# Altium PCB Extension.PcbDoc
Units mil, origin at the board's own origin, x right, y up, seen from the top; angles counter-clockwise.
Board outline 1900 x 2770 mil, 2 copper layers (Top Layer, Bottom Layer); 26 components, 28 nets, 86 pads, 4 vias.
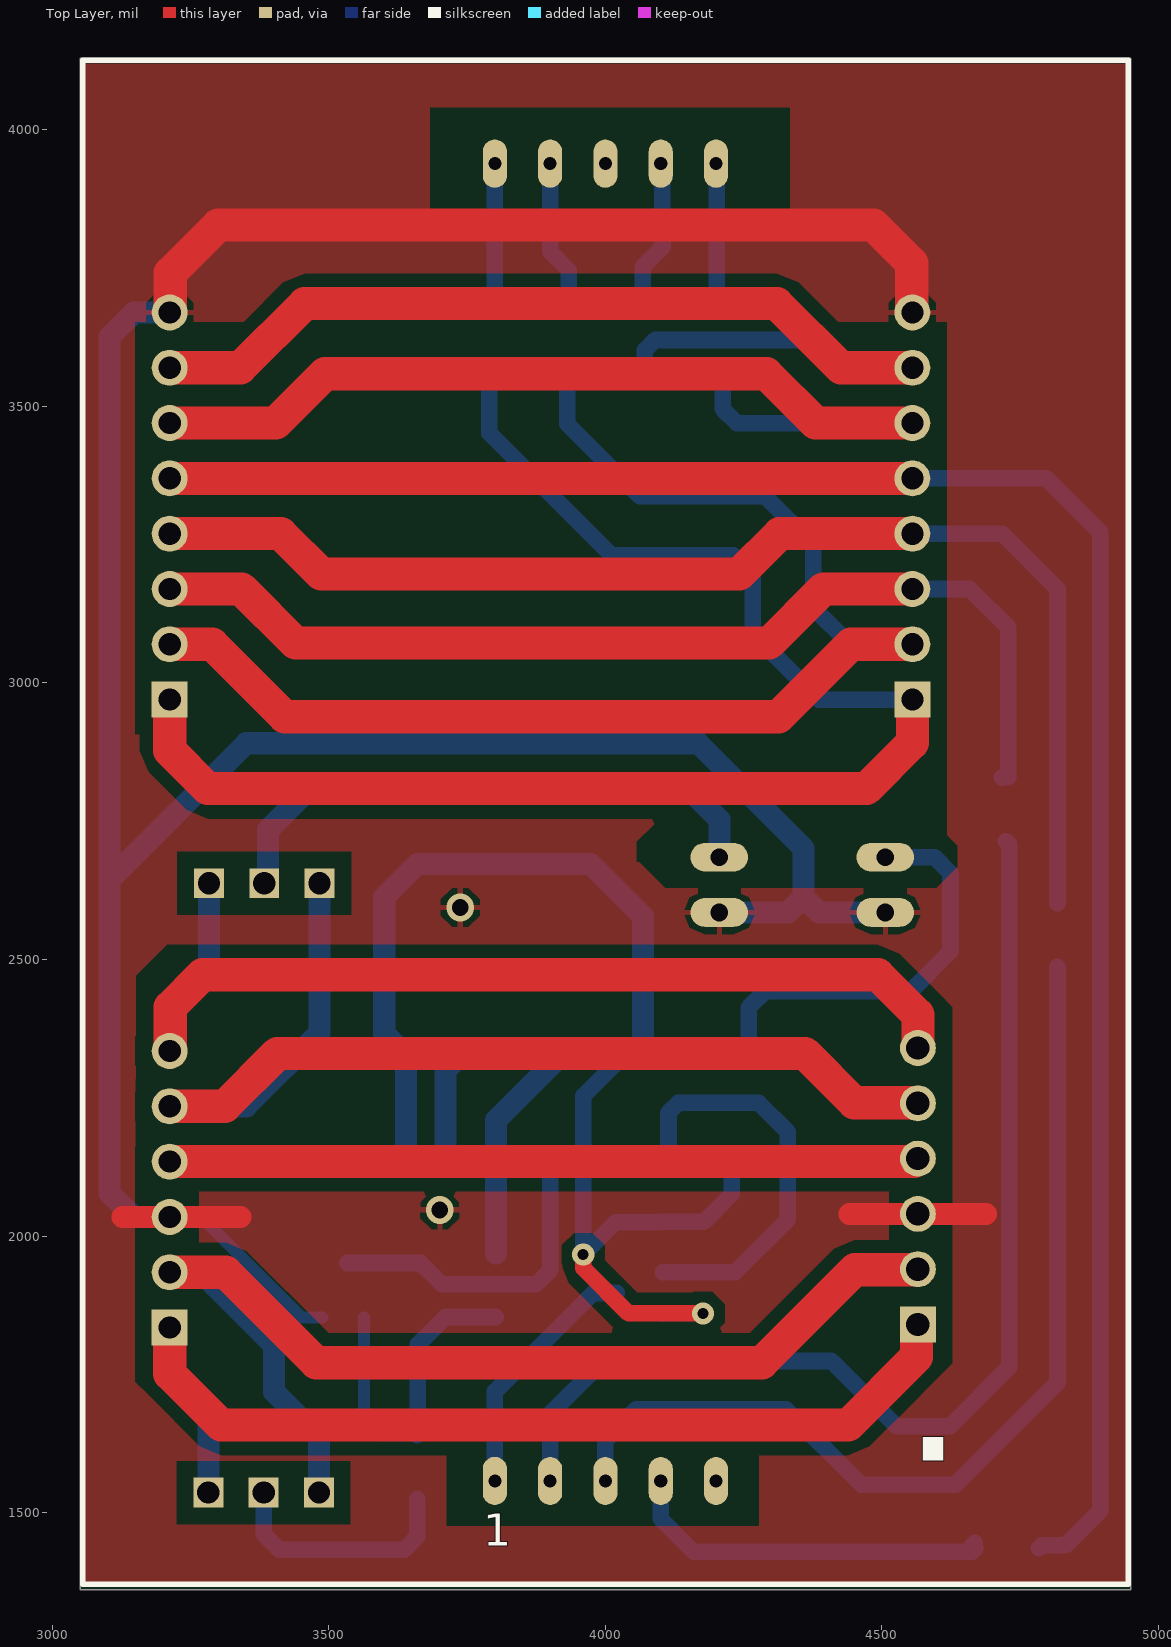
[diagram p0: Top Layer view]
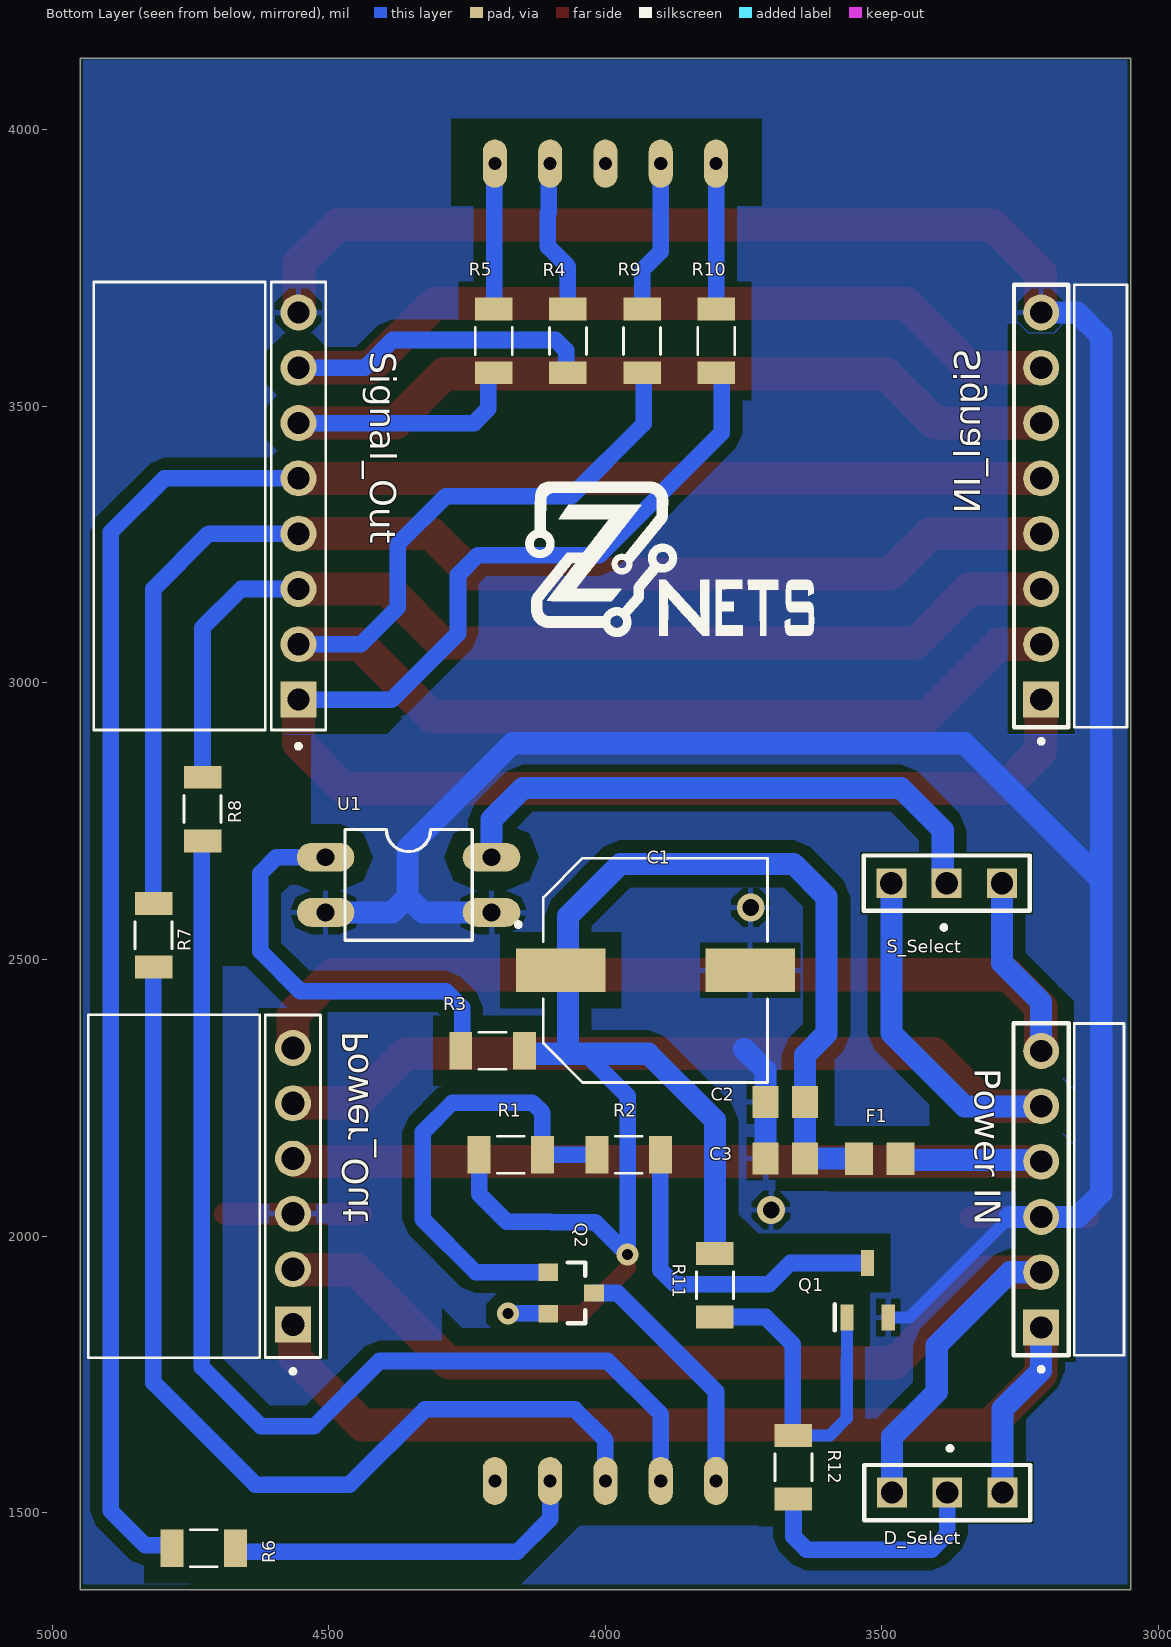
[diagram p1: Bottom Layer view, seen from below]
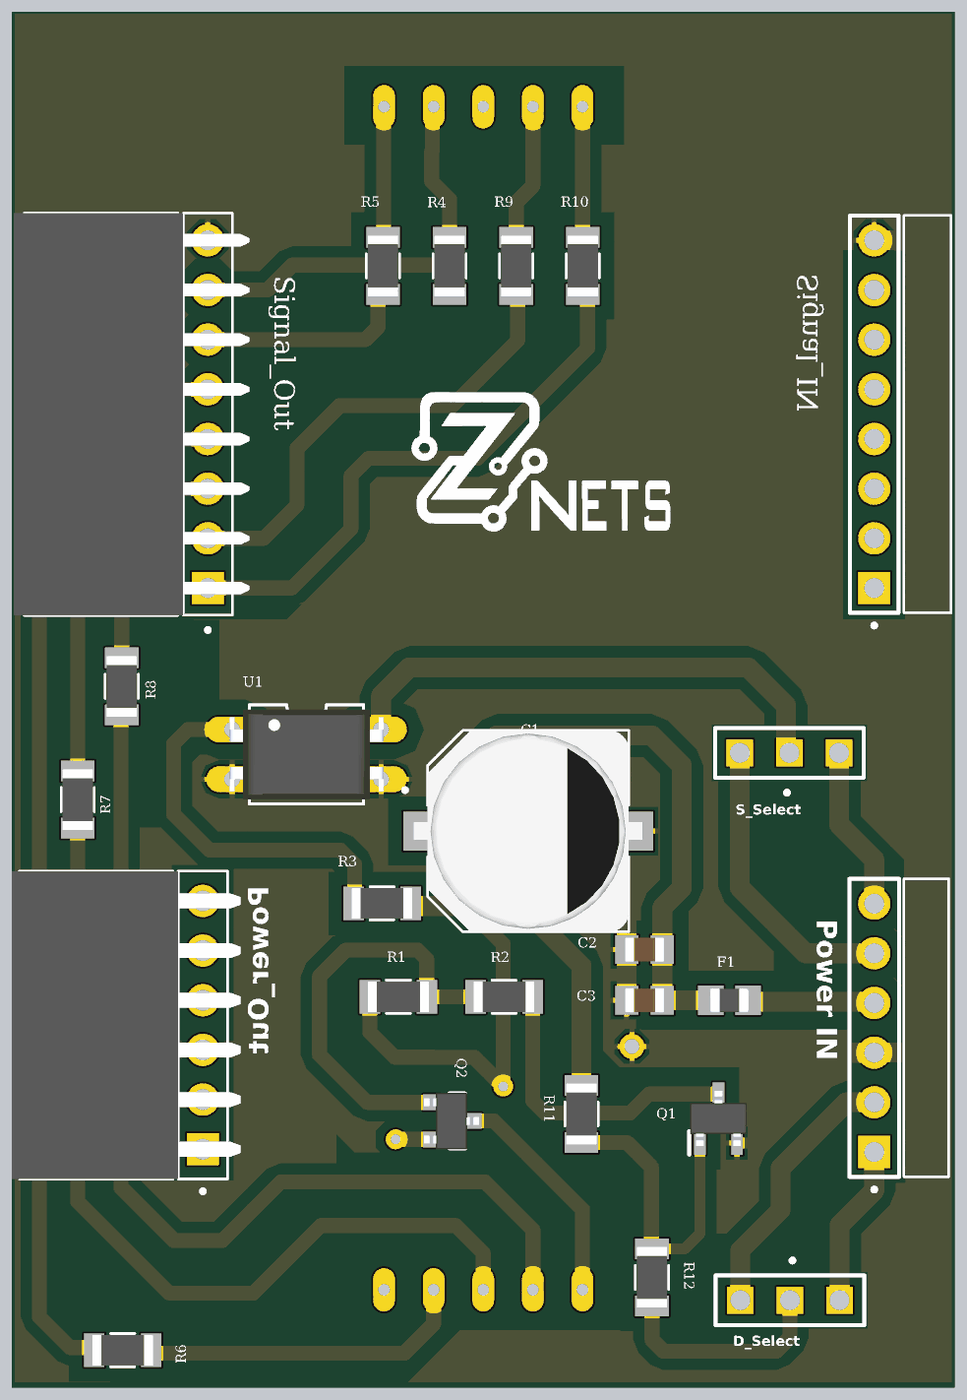
[diagram p2: 3D render of the assembled board from below, using the file's embedded part models]

## Layer stack, top to bottom
Top Solder: solder mask 0.4, Solder Resist, Dk 3.5
Top Layer: signal copper 1.4
Dielectric 1: dielectric 12.6, FR-4, Dk 4.8
Bottom Layer: signal copper 1.4
Bottom Solder: solder mask 0.4, Solder Resist, Dk 3.5

## Board outline
3050,1360 3050,4130 4950,4130 4950,1360

## Design rules (kind name [scope] priority, off if disabled: settings)
Clearance [All] p1: gap=20 ignorepadtopadclearanceinfootprint=FALSE except(0: Arc-Hole Track-Hole SMDPad-Hole THPad-Hole Via-Hole Fill-Hole Poly-Hole Region-Hole Text-Hole; 10: Fill-Fill Fill-Poly Fill-Region Poly-Poly Poly-Region Region-Region; 30: SMDPad-Fill SMDPad-Poly SMDPad-Region THPad-Fill THPad-Poly THPad-Region)
PolygonConnect [All] p1: connectstyle=Relief reliefconductorwidth=10 reliefentries=4 polygonreliefangle="90 Angle" airgapwidth=10
RoomDefinition Extension [InComponentClass('Extension')] p1: confinementstyle=ConfineIn formatcopy=TRUE lockcomponents=FALSE outline 3050,1360 4950,1360 4950,4130 3050,4130
RoutingVias [All] p1: holewidth=28 width=50 viastyle="Through Hole" minholewidth=28 minwidth=50 maxholewidth=28 maxwidth=50
SolderMaskExpansion [All] p1: expansion=4 istentingtop=FALSE
UnpouredPolygon [InNet('GND_M')] p1:
Width [All] p1: maxlimit=100 minlimit=20 preferedwidth=30 bottomlayer_maxwidth=50 minimp=50.000000 maximp=50.000000 favimp=50.000000
29 further rules are at their usual default settings.

## Components (designator, comment, footprint, x,y, rotation, side; value= is the part's Value field where it differs from the comment)
. "7 Seg" 2.3_7-SEG_DIS 4000,2750 r0 top (schematic designator .1)
C1 "100uF 35V" "100uF 35V" 3909.5,2480.5 r180 bottom
C2 "1uF" "Capacitor 0805" 3675,2242 r0 bottom
C3 "100nF" "Capacitor 0805" 3675,2140 r0 bottom
D_Select "Pin Header Male 3 Pin" 3Pin-M-Header_3MX1-254MM 3482,1536 r270 bottom (schematic designator D_Select1)
F1 "Ferrite Bead 0805" "Ferrite Bead 0805" 3504,2140 r0 bottom
"Power IN" "Pin Header Male 6 Pin" 6Pin-M-Header_6MX1-254MM 3212.13,2084.5 r270 bottom (schematic designator "Power IN1")
Power_Out "Pin Header Female 6 Pin" 6Pin-F-Header_6FX1-254MM 4565,2090 r90 bottom (schematic designator Power_Out1)
Q1 "AO3400-N" AO-3400-N-SOT95 3526,1902 r90 bottom
Q2 "AO3401-P" AO-3401-P-SOT23-3 4064,1897 r270 bottom
R1 "100K" "Resistor 1206" 4171,2147 r180 bottom
R2 "100R" "Resistor 1206" 3958,2147 r180 bottom
R3 "1K" "Resistor 1206" 4204,2335 r180 bottom
R4 "240R" "Resistor 1206" 4067.83,3618.5 r90 bottom
R5 "240R" "Resistor 1206" 4202,3618.5 r90 bottom
R6 "240R" "Resistor 1206" 4726.5,1435.5 r180 bottom
R7 "240R" "Resistor 1206" 4817,2544.02 r270 bottom
R8 "240R" "Resistor 1206" 4728.5,2772 r270 bottom
R9 "240R" "Resistor 1206" 3933.67,3618.5 r90 bottom
R10 "240R" "Resistor 1206" 3799.5,3618.5 r90 bottom
R11 "100K" "Resistor 1206" 3802,1911 r270 bottom
R12 "4.7K" "Resistor 1206" 3660,1582 r270 bottom
S_Select "Pin Header Male 3 Pin" 3Pin-M-Header_3MX1-254MM 3283,2638 r90 bottom (schematic designator S_Select1)
Signal_IN "Pin Header Male 8 Pin" 8Pin-M-Header_8MX1-254MM 3212.13,3320 r270 bottom (schematic designator Signal_IN1)
Signal_Out "Pin Header Female 8 Pin" 8Pin-F-Header_8FX1-254MM 4555,3320 r90 bottom (schematic designator Signal_Out1)
U1 "PC817X3NSZ9F" "PC 817" 4356,2635 r270 bottom

## Footprints (in the part's own frame and the unit in brackets; to place one, negate y for a bottom-side part, rotate by r counter-clockwise, add the part's x,y. Pads: shape width x height; smd on the part's side, far side on the other; paste and mask are expansions set on the pad)
2.3_7-SEG_DIS [mm]
  oval 1.108x2.216 hole 0.6: 1(-5.08,-30.3) 2(-2.54,-30.302) 3(0,-30.302) 4(2.54,-30.302) 5(5.08,-30.302) 6(5.08,30.201) 7(2.54,30.201) 8(0,30.201) 9(-2.54,30.201) 10(-5.08,30.201)
  silkscreen extent -24,-35.05 24,34.95
3Pin-M-Header_3MX1-254MM [mm]
  rect 1.37x1.37 hole 1.02: 01(0,0) 02(0,2.54) 03(0,5.08)
  silkscreen extent -2.13,-1.27 1.27,6.35
6Pin-F-Header_6FX1-254MM [mil]
  rect 65x65 hole 42.13: 1(-250,0)
  round 65 hole 42.13: 2(-150,0) 3(-50,0) 4(50,0) 5(150,0) 6(250,0)
  silkscreen extent -339,-50 310,370, body extent -310,-76 310,385, height 101
6Pin-M-Header_6MX1-254MM [mil]
  rect 65x65 hole 40.16: 01(250,0)
  round 65 hole 40.16: 02(150,0) 03(50,0) 04(-50,0) 05(-150,0) 06(-250,0)
  silkscreen extent -300,-50 330,150
8Pin-F-Header_8FX1-254MM [mil]
  rect 65x65 hole 40.16: 1(-350,0)
  round 65 hole 40.16: 2(-250,0) 3(-150,0) 4(-50,0) 5(50,0) 6(150,0) 7(250,0) 8(350,0)
  silkscreen extent -438,-49 405,370, body extent -405,-84 405,391, height 99
8Pin-M-Header_8MX1-254MM [mil]
  rect 65x65 hole 40.16: 01(350,0)
  round 65 hole 40.16: 02(250,0) 03(150,0) 04(50,0) 05(-50,0) 06(-150,0) 07(-250,0) 08(-350,0)
  silkscreen extent -400,-49 430,155
"100uF 35V" [mm]
  rect 4.1x2 smd: 1(-4.35,0) 2(4.35,0)
  silkscreen extent -6.4,-5.15 5.15,5.15, body extent -5.85,-5.15 5.85,5.15, height 10.32
AO-3400-N-SOT95 [mm]
  rect 1.2x0.6 smd: 1(-1.25,0.95) 2(-1.25,-0.95) 3(1.25,0)
  silkscreen extent -1.85,1.5 -0.65,1.5, body extent -1.4,-1.45 1.4,1.45, height 1.25
AO-3401-P-SOT23-3 [mm]
  rect 0.8x0.9 smd: 1(-0.95,-1) 2(0.95,-1) 3(0,1.1)
  silkscreen extent -1.4,-0.1 1.4,0.7, body extent -1.45,-1.4 1.45,1.4, height 1.25
"Capacitor 0805" [mm]
  rect 1.19x1.47 smd: 1(-0.91,0) 2(0.91,0)
  body extent -1,-0.63 1,0.63, height 1.45
"Ferrite Bead 0805" [mm]
  rect 1.3x1.5 smd: 1(-0.95,0) 2(0.95,0)
  body extent -1,-0.63 1,0.63, height 1.05
"PC 817" [mil]
  oval 52x104 hole 32: 1(-50,-150) 2(50,-150) 3(50,150) 4(-50,150)
  silkscreen extent -100,-115 100,115, body extent -91,-155 91,155, height 329
"Resistor 1206" [mm]
  rect 1.05x1.72 smd: 1(-1.46,0) 2(1.46,0)
  silkscreen extent -0.62,-0.85 0.62,0.85, body extent -1.55,-0.77 1.55,0.77, height 0.65

## Part data
C1: "100ÂµF 35V Aluminum Electrolytic Capacitors Radial, Can - SMD 2000 Hrs @ 85Â°C", Package="RADIAL-2 Panasonic", Availability="In Stock", Check_prices=https://www.snapeda.com/parts/EEH-ZC1J330P/Panasonic/view-part/509435/?ref=eda, MF=Panasonic, MP=EEH-ZC1J330P, Price=None, Purchase-URL=https://pricing.snapeda.com/search/part/EEH-ZC1J330P/?ref=eda, SnapEDA_Link=https://www.snapeda.com/parts/EEH-ZC1J330P/Panasonic/view-part/509435/?ref=snap
C2 C3: library part "Capacitor 0805", "0.1 ÂµF Â±10% 50V Ceramic Capacitor X7R 0805 (2012 Metric)", Package="2012 Murata", Check_prices=https://www.snapeda.com/parts/GCE21BR71H104KA01L/Murata+Electronics+North+America/view-part/?ref=eda, MF=Murata, MP=GCE21BR71H104KA01L, SnapEDA_Link=https://www.snapeda.com/parts/GCE21BR71H104KA01L/Murata+Electronics+North+America/view-part/?ref=snap
D_Select "Power IN" S_Select Signal_IN: Package=None, Availability=Unavailable, Price=None
  D_Select S_Select: MP=TSW-101-23-L-T
  "Power IN": MP=MTSW-106-24-G-S-300
  Signal_IN: MP=HTSW-108-07-G-S-LL
F1: "BLM Series 0805 1 kOhm 200 mA 0.45 DCR Surface Mount Ferrite Bead", Package="805-2 Murata", Check_prices=https://www.snapeda.com/parts/BLM21AH102SN1D/Murata/view-part/?ref=eda, MF=Murata, MP=BLM21AH102SN1D, SnapEDA_Link=https://www.snapeda.com/parts/BLM21AH102SN1D/Murata/view-part/?ref=snap
Power_Out: "6 Position Total Single Row 2.54 mm Pitch Straight Female Header", Package=None, Check_prices=https://www.snapeda.com/parts/PPTC061LFBNRC/Sullins/view-part/?ref=eda, MF="Sullins Connector Solutions", MP=PPTC061LFBNRC, SnapEDA_Link=https://www.snapeda.com/parts/PPTC061LFBNRC/Sullins/view-part/?ref=snap
Q1: "N-Channel 30 V 5.8A (Ta) 1.4W (Ta) Surface Mount SOT-23-3", Package="SOT-23-3 Alpha &amp; Omega Semiconductor", Check_prices=https://www.snapeda.com/parts/AO3400/Alpha+%2526+Omega+Semiconductor+Inc./view-part/?ref=eda, MF="Alpha &", MP=AO3400, SnapEDA_Link=https://www.snapeda.com/parts/AO3400/Alpha+%2526+Omega+Semiconductor+Inc./view-part/?ref=snap
Q2: "P-Channel 30 V 4A (Ta) 1.4W (Ta) Surface Mount SOT-23-3", Package="SOT-23-3 Alpha &amp; Omega Semiconductor", Check_prices=https://www.snapeda.com/parts/AO3401/Alpha/view-part/?ref=eda, MF="Alpha & Omega Semiconductor", MP=AO3401, SnapEDA_Link=https://www.snapeda.com/parts/AO3401/Alpha/view-part/?ref=snap
R1 R2 R3 R4 R5 R6 R7 R8 R9 R10 R11 R12: library part "Resistor 1206", "Fixed Resistor CRGCQ 1206 10K 5%", Package="3115 TE Connectivity", Check_prices=https://www.snapeda.com/parts/CRGCQ1206J10K/TE+Connectivity/view-part/?ref=eda, MF="TE Connectivity", MP=CRGCQ1206J10K, SnapEDA_Link=https://www.snapeda.com/parts/CRGCQ1206J10K/TE+Connectivity/view-part/?ref=snap
Signal_Out: "Headers & Wire Housings 2.54MM 0.1 8-PIN FEMALE HEADER", Package=None, Availability="In Stock", Check_prices=https://www.snapeda.com/parts/8Fx1-254mm/Gravitech/view-part/?ref=eda, MF=Gravitech, MP=8Fx1-254mm, Price=None, Purchase-URL=https://pricing.snapeda.com/search/part/8Fx1-254mm/?ref=eda, SnapEDA_Link=https://www.snapeda.com/parts/8Fx1-254mm/Gravitech/view-part/?ref=snap
U1: "Optoisolator Transistor Output 5000Vrms 1 Channel 4-DIP", Package="DIP-4 Sharp Microelectronics", Check_prices=https://www.snapeda.com/parts/PC817X3NSZ9F/Sharp+Microelectronics/view-part/?ref=eda, MF="Sharp Microelectronics", MP=PC817X3NSZ9F, SnapEDA_Link=https://www.snapeda.com/parts/PC817X3NSZ9F/Sharp+Microelectronics/view-part/?ref=snap

## Via types
v1: diameter 40, hole 20, Top Layer to Bottom Layer, 2 vias
v2: diameter 50, hole 30, Top Layer to Bottom Layer, 2 vias

## Nets (pads, with @x,y where several pads share a name; then routed paths per layer and width w, separated by ;. In a path a pad name is that pad's centre, name@x,y a point inside that pad or via, vN(x,y) a via of type N, cw(c..) or ccw(c..) an arc to the next point about the centre after c; other vN are vias at no path point)
12V_M: C1.1 C2.1 C3.1 F1.2 Q2.2 R1.1 R3.2 R11.1 | length 3135.8
  Top Layer w30: v1(3959.81,1966.31) 3959.81,1942.19 4042,1860 v1(4176.5,1860)
  Bottom Layer w30: 4036,2329.62 3959.81,2253.43 v1(3959.81,1966.31) 4018.71,2025.21 4098.25,2025.21 4098.55,2025.5 4178.09,2025.5 4228.48,2075.89 R1.1 ; Q2.2 4103.77,1860 v1(4176.5,1860)
  Bottom Layer w40: F1.2 C3.1 3639.17,2326.83 3600,2366 3600,2613 3660,2673 3973,2673 4067.76,2578.24 4067.76,2329.62 ; R11.1 3802,2209.24 3922.38,2329.62 4036,2329.62 4067.76,2329.62 ; R3.2 4146.52,2330.29 4145.85,2329.62 4067.76,2329.62
12V_S: "Power IN.04" F1.1 Power_Out.4 | length 1611.9
  Top Layer w60: 3212.13,2134.5 4558.15,2134.5 4563.65,2140 Power_Out.4
  Bottom Layer w30: 3212.13,2134.5 3214.88,2137.25 ; F1.1@3463.85,2137.25 F1.1
  Bottom Layer w40: 3214.88,2137.25 F1.1@3463.85,2137.25
A_M: R4.1 Signal_IN.07 Signal_Out.7 | length 1988.6
  Top Layer w60: Signal_IN.07 3340,3570 3456,3686 4310,3686 4426,3570 Signal_Out.7
  Bottom Layer w30: R4.1@4071.33,3564.52 4071,3564.85 4071,3601.43 4089.76,3620.19 4384.81,3620.19 4435,3570 Signal_Out.7
B_M: R5.1 Signal_IN.06 Signal_Out.6 | length 1839.2
  Top Layer w60: Signal_IN.06 3404,3470 3493,3559 4291,3559 4380,3470 Signal_Out.6
  Bottom Layer w30: R5.1@4212,3564.52 4212,3495.5 4237.5,3470 Signal_Out.6
C_M: R6.1 Signal_IN.05 Signal_Out.5 | length 3629.7
  Top Layer w60: Signal_IN.05 Signal_Out.5@4553.65,3370
  Bottom Layer w30: Signal_Out.5 4797.5,3370 4894.5,3273 4894.5,1503 4832.08,1440.58 4789.06,1440.58 R6.1
D_M: R7.1 Signal_IN.04 Signal_Out.4 | length 2276
  Top Layer w60: Signal_IN.04 3413,3270 3486,3197 4242,3197 4315,3270 Signal_Out.4
  Bottom Layer w30: Signal_Out.4 4717.5,3270 4817.5,3170 4817.5,2602 R7.1
DIG3_M: "Power IN.02" D_Select.01 Power_Out.2 | length 2033.9
  Top Layer w60: 3212.13,1934.5 3313.5,1934.5 3477,1771 4283,1771 4451.04,1939.04 4564.04,1939.04 Power_Out.2
  Bottom Layer w40: 3212.13,1934.5 3268.5,1934.5 3401,1802 3401,1718 3482,1637 D_Select.01
DIG4_M: "Power IN.01" D_Select.03 Power_Out.1 | length 1910.6
  Top Layer w60: 3212.13,1834.5 3212.13,1750.87 3305,1658 4439,1658 4562.5,1781.5 4562.5,1837.5 Power_Out.1
  Bottom Layer w40: 3212.13,1834.5 3212.13,1756.87 3282,1687 D_Select.03
DIG_NPN: D_Select.02 R12.2 | length 442.4
  Bottom Layer w30: D_Select.02 3382,1461 3410,1433 3636.57,1433 3660,1456.43 R12.2
E_M: R8.1 Signal_IN.03 Signal_Out.3 | length 1897.8
  Top Layer w60: Signal_IN.03 3342,3170 3440,3072 4296,3072 4394,3170 Signal_Out.3
  Bottom Layer w30: Signal_Out.3 4658.5,3170 4728.5,3100 R8.1 ; R8.1@4717,2828.98 R8.1@4717.5,2829.48
F_M: R9.1 Signal_IN.02 Signal_Out.2 | length 2403.5
  Top Layer w60: Signal_IN.02 3289,3070 3420,2939 4313,2939 4444,3070 Signal_Out.2
  Bottom Layer w30: R9.1@3930.67,3564.52 3930.67,3468.83 4062,3337.5 4289,3337.5 4375.5,3251 4375.5,3136.75 4442.25,3070 Signal_Out.2
G_M: R10.1 Signal_IN.01 Signal_Out.1 | length 2715.2
  Top Layer w60: Signal_IN.01 3212.13,2877.87 3281,2809 4472,2809 4555,2892 Signal_Out.1
  Bottom Layer w30: R10.1@3790,3564.52 3790,3452 4011,3231 4231,3231 4266.5,3195.5 4266.5,3089.5 4386,2970 Signal_Out.1
GND_M: "Power IN.03" C1.2 C2.2 C3.2 Power_Out.3 Q1.2 Signal_IN.08 Signal_Out.8 U1.2 U1.3 | length 6250.2
  Top Layer w30: 3125,2032.5 3127,2034.5 ; 3340,2034.5 3342.5,2037 ; 4440.5,2039 4441.5,2040 ; 4688,2040 4689.5,2041.5
  Top Layer w40: 3127,2034.5 3212.13,2034.5 3340,2034.5 ; 4441.5,2040 Power_Out.3 4688,2040
  Top Layer w60: Signal_IN.08 3213.08,3670.96 3213.08,3741.08 3300,3828 4485,3828 4554.04,3758.96 4554.04,3670.96 Signal_Out.8
  Bottom Layer w22: 3269,2034.5 3450.71,1852.79 Q1.2
  Bottom Layer w40: Signal_IN.08 3147.5,3670 3103.5,3626 3103.5,2644 ; 3269,2034.5 3212.13,2034.5 3212.03,2034.59 3146.41,2034.59 3103.5,2077.5 3103.5,2644 ; C3.2 C2.2 3710.83,2299.83 3749.24,2338.24 ; U1.3 4330,2585 4358,2613 ; U1.2 4386,2585 4358,2613 ; 3103.5,2644 3350.5,2891 4168,2891 4358,2701 4358,2613
  other v2: 3700.5,2047 3737.5,2594
M_IN: S_Select.02 U1.4 | length 1038
  Bottom Layer w40: S_Select.02 3389.97,2644.97 3389.97,2733.97 3466,2810 4149,2810 4206,2753 U1.4
M_IN_1: "Power IN.06" Power_Out.6 S_Select.01 | length 1878.5
  Top Layer w60: 3213,2334.5 3213,2414 3271.37,2472.37 4492.63,2472.37 4565,2400 Power_Out.6
  Bottom Layer w40: 3212.13,2334.5 3212.13,2423.13 3283,2494 S_Select.01
M_IN_2: "Power IN.05" Power_Out.5 S_Select.03 | length 2026.5
  Top Layer w60: 3212.13,2234.5 3311.5,2234.5 3407,2330 4361,2330 4450.04,2240.96 4564.04,2240.96 Power_Out.5
  Bottom Layer w40: 3212.13,2234.5 3350.5,2234.5 3483,2367 S_Select.03
Net._1: ..1 Q2.3 | length 456.3
  Bottom Layer w30: ..1 3800,1719 3978,1897 Q2.3
Net._2: ..2 R8.2 | length 2037.8
  Bottom Layer w30: ..2 3900,1678 3996,1774 4408.5,1774 4526.49,1656.01 4623.03,1656.01 4730,1762.99 4730,2708.35 4724.33,2714.02 R8.2@4723.83,2714.02
Net._3: ..3 R7.2 | length 1800
  Bottom Layer w30: ..3 4000,1631 4055.5,1686.5 4326.5,1686.5 4462.5,1550.5 4633,1550.5 4817.5,1735 4817.5,2486.04 R7.2
  Bottom Layer w40: ..3 ..3@4000.69,1557.69
Net._4: ..4 R6.2 | length 671.2
  Bottom Layer w30: ..4 4100,1488.5 4159.5,1429 4663.35,1429 4669.02,1434.67 R6.2 ; R6.2@4663.36,1441.16 R6.2@4667.52,1445.31
Net._6: ..6 R5.2 | length 263.8
  Bottom Layer w30: ..6 4201,3938 4201,3676.98 R5.2
Net._7: ..7 R4.2 | length 279.7
  Bottom Layer w30: R4.2 4067.83,3752.83 4104,3789 4104,3849.25 4102.61,3850.64 4102.61,3936.39 ..7
Net._9: ..9 R9.2 | length 277
  Bottom Layer w30: ..9 3900,3780 3933.67,3746.33 R9.2
Net._10: ..10 R10.2 | length 263.2
  Bottom Layer w30: R10.2 3799.75,3676.23 3799.75,3938.75 ..10
NetQ1_1: Q1.1 R11.2 R12.1 | length 618
  Bottom Layer w22: Q1.1@3563.46,1852.73 3563.46,1777 3563.52,1776.94 3563.52,1670.48 3594.52,1639.48 R12.1
  Bottom Layer w30: R12.1 3661,1640.48 3661,1804 3710.52,1853.52 R11.2
NetQ1_3: Q1.3 R2.2 | length 602.7
  Bottom Layer w30: Q1.3@3533,1951.21 3665.79,1951.21 3704.19,1912.81 3875,1912.81 3900.52,1938.33 R2.2
NetQ2_1: Q2.1 R1.2 R2.1 | length 843.9
  Bottom Layer w30: R2.1 R1.2 4114,2147.48 4114,2223 4132,2241 4277,2241 4330,2188 4330,2030 4234.4,1934.4 Q2.1
NetR3_1: R3.1 U1.1 | length 757.3
  Bottom Layer w30: R3.1 4259,2337.48 4259,2413 4288.35,2442.35 4551.35,2442.35 4624,2515 4624,2656 4595,2685 U1.1
pads on no net: ..5 ..8

## Polygon pours and split planes (outlines as drawn)
GND_M on Bottom Layer "GND_M_L02_P000" (solid, remove dead copper, pour order 0): 3056,4125.5 3057,4126.5 4944,4126.5 4944,1371.5 4943,1370.5 3056,1370.5 3056,4126.5
no net on Bottom Layer "NONET_L02_P003" (solid, pour order 3): 3149.63,2907.5 3149.63,3649.87 3149.5,3650 3172.02,3650 3189.52,3632.5 3234.73,3632.5 3252.23,3650 3274.63,3650 3274.63,3595.89 3274.63,2907.5
GND_M on Top Layer "GND_M_L01_P002" (solid, remove dead copper, pour order 2): 4940.46,4119.58 4940.46,1364.58 4939.46,1365.58 3051.46,1365.58 3051.46,4119.58

## Other copper
Top Layer:
  pour cut-out: 3173.86,1712.61 3149.63,1736.84 3149.63,1759.25 3165.25,1759.25 3173.86,1750.64
  pour cut-out: 3149.63,1772 3149.63,1759.25 3158.01,1750.87 3158.01,1771.63
  pour cut-out: 3149.66,1785.14 3151.69,2470.31 3207.99,2526.6 3270.87,2526.6 3270.87,2507.48 3200,2419 3205.5,2396.11 3205.5,2194.11 3227.5,2146 3240.5,2072 3284.03,1779.23
  pour cut-out: 4512.5,1992.88 4512.5,2022.12 4540.51,2022.12 4540.51,1992.88
  pour cut-out: 4540.51,2085.88 4540.51,2070.46 4526.47,2057.6 4512.5,2057.6 4512.5,2085.88
  pour cut-out: 3236.25,1975 3266,1975 3266,2016.9 3254.15,2016.9 3232.75,1995.5 3236.25,1992
  pour cut-out: 3227,2052.1 3266,2052.1 3266,2091.5 3243.5,2091.5 3223.5,2071.5 3227,2068
  pour cut-out: 3149.49,2017 3149.49,1960.62 3169.62,1960.62 3171.1,1960.62 3198.49,1988.01 3169.51,2017
  pour cut-out: 3149.5,2108.49 3149.5,2052.1 3169.63,2052.1 3171.1,2052.1 3198.5,2079.5 3169.51,2108.49
  pour cut-out: 3169.63,2052.1 3169.63,2088.61 3149.63,2108.61 3149.5,2108.49 3149.5,2052 3169.52,2052
  pour cut-out: 4617,3652 4617.5,2694.5 4617,2694 4574,2737 4485,2737 4427,2737 4418.81,3652
  pour cut-out: 3149.5,3592.5 3149.5,2907.5 3292,2907.5 3371.5,2987 3371.5,3652.4 3149.5,3652.4
  pour cut-out: 4582,2760 4636,2706 4636,2668 4598,2630 4108,2630 4061,2677 4057,2677 4057,2713 4093,2749 4118,2749 4129,2760
  pour cut-out: 4603.27,2438.27 4627.5,2414.04 4627.5,1769.96 4574.13,1716.59 4603.27,2126.27
  pour cut-out: 4332,4040 4333,4039 4333,3827 4332,3826 3683,3826 3683,4039 3682,4040
Bottom Layer:
  pour cut-out: 4197.19,2398.86 4210.81,2398.86 4214,2395.67 4214,2387 4191,2387 4197.19,2393.19
  pour cut-out: 4650.79,2488.21 4706,2488.21 4703,2672.5 4695.5,2680 4687,2671.5 4650,2671.5 4650,2489
  pour cut-out: 4578.14,2415.57 4575.08,2412.5 4569,2412.5 4572.07,2415.57
  pour cut-out: 4152,1476.5 4152,1528.5 4046,1634.5 4064.5,1653 4326.5,1653 4456.5,1523 4787.5,1523 4846.5,1582 4846.5,2451.5 4866.5,2451.5 4873,2445 4870,2442 4870,1516.5 4862,1516.5 4818.5,1473 4817.5,1474 4752,1474 4752,1370.5 4752.5,1370 4152.5,1370 4046,1476.5 4056.58,1487.08 4056.58,1634
  pour cut-out: 4492.5,2907.5 4394.92,2907.5 4364.42,2938 4501.5,2938 4501.5,2916.5
  pour cut-out: 3738.14,2019.15 3722.5,2003.51 3722.5,2001.5 3750.5,2001.5 3776.5,2027.5 3761,2043 3761,2042.01 3723,2004.01 3723,2004
  pour cut-out: 3149.63,2907.5 3149.63,3649.87 3171.9,3649.87 3172.02,3650 3274.63,3650 3274.63,2907.5
  pour cut-out: 3253.54,2080.47 3250.01,2084 3267.01,2101 3413.5,2101 3427,2087.5 3419.97,2080.47
  pour cut-out: 3596.99,2080.47 3597.02,2080.5 3681,2080.5 3681,2086.5 3678.66,2084.16 3597.28,2084.16 3597.28,2081.35 3596.99,2081.06
  pour cut-out: 3567.98,2005 3757,2005 3764,1998 3744.25,1978.25 3559.47,1978.25 3559.47,1996.5
  pour cut-out: 3586.4,1987 3764,1998 3756.42,1950.81 3734,1897 3637.71,1888.71 3582.42,1944 3582.42,1983.02
  pour cut-out: 3149.63,2054.63 3149.63,2108.61 3172.39,2108.61 3197,2084 3250.01,2084 3258.5,2092.49 3258.5,1966.5 3252.39,1960.39 3149.63,1960.39
  pour cut-out: 4502.5,2022.5 4522.4,2022.5 4542.4,2002.5 4587.6,2002.5 4607.6,2022.5 4627.5,2022.5 4627.5,1879.5 4525.5,1879.5 4502.5,1902.5 4502.5,1914.11
  pour cut-out: 4502.5,2404.5 4510.5,2412.5 4627.5,2412.5 4627.5,2365.89 4627.5,2057.5 4607.6,2057.5 4587.6,2077.5 4542.4,2077.5 4522.5,2057.6 4502.6,2057.6 4502.5,2057.5 4502.5,2114.11
  pour cut-out: 4580,3137 4583.5,3140.5 4684,3140.5 4740,3084.5 4725.5,3070 4725.5,2839 4634.5,2839 4623.5,2828 4583,2868.5 4583,3130.5 4580,3133.5
  pour cut-out: 4531.5,2746.11 4531.5,2906.5 4616.5,2906.5 4617.5,2907.5 4692.12,2832.88 4692.12,2656 4661.51,2656 4607.99,2720.5 4544.5,2720.5 4544.5,2733.11
  pour cut-out: 4779.62,2765.19 4779.62,2778.81 4664.64,2778.81 4664.64,2765.19 4664.64,2778.81 4664.64,2765.19
  pour cut-out: 3735.64,3726.65 4265.86,3726.65 4265.86,3512.14 4266,3512 4264.35,3510.35 3735.64,3510.35
  pour cut-out: 3505.14,1670.48 3529.97,1670.48 3537.65,1653.5 3519.15,1635 3504.65,1635 3502.06,1667.41
  pour cut-out: 4557,2634 4541,2634 4546.5,2639.5 4557,2639.5
  pour cut-out: 4557,2634 4571,2634 4594,2611 4596,2613 4596,2647 4573,2647 4566,2654 4557,2645
  pour cut-out: 3414.5,2235.5 3414.5,2199.5 3396.5,2199.5 3386.64,2209.36 3413.03,2235.74 3414.5,2237.74
  pour cut-out: 3152.5,2365.89 3152.5,2424.73 3179,2451.23 3179,2380 3159,2360 3153.11,2365.89
  pour cut-out: 3152.5,2314.11 3152.5,2265.89 3176.61,2290
  pour cut-out: 3152.5,2214.11 3152.5,2165.89 3182,2195.39 3182,2198 3168.61,2198
  pour cut-out: 3152.5,1914.11 3152.5,1894.5 3156,1898 3175,1898 3175,1901 3161,1915 3160.11,1914.11
  pour cut-out: 3411.01,2199.53 3401.15,2209.39 3259.39,2209.39 3238,2188 3249,2177 3411,2177 3424,2190 3414.47,2199.53
  pour cut-out: 3585.75,2300.94 3585.75,2322.75 3589,2326 3604,2311 3604,2293 3593.68,2293
  pour cut-out: 3596,1446 3658,1446 3742,1530 3742,1609 3611,1609 3597,1623 3596,1622
  pour cut-out: 3716,4021 3727,4021 4280,4021 4280,3861 4279,3862 3716,3862 3716,4016
  pour cut-out: 4296,1871 4296,1754 3961,1754 3960,1755 3867,1662 3867,1628 3829,1628 3827,1630 3833,1636 3833,1693 3839,1693 3980,1834 4259,1834
Multi-Layer:
  pour cut-out: 4276,1476 4277,1477 4277,1634 3714,1634 3713,1635 3713,1476 3728,1476

## Silkscreen, mask and mechanical layers (free items; w line width, h text height)
Bottom Overlay:
  drawing of 6 lines, arcs and shapes, not listed
Mechanical 1:
  the board outline again, w10

## Text inside footprints (layer, text, board x,y; h text height)
.: Top Overlay "1" at 3779,1420 h100